# EAGLE board Duckietown Rev 2018A (EAGLE 8.5.2)
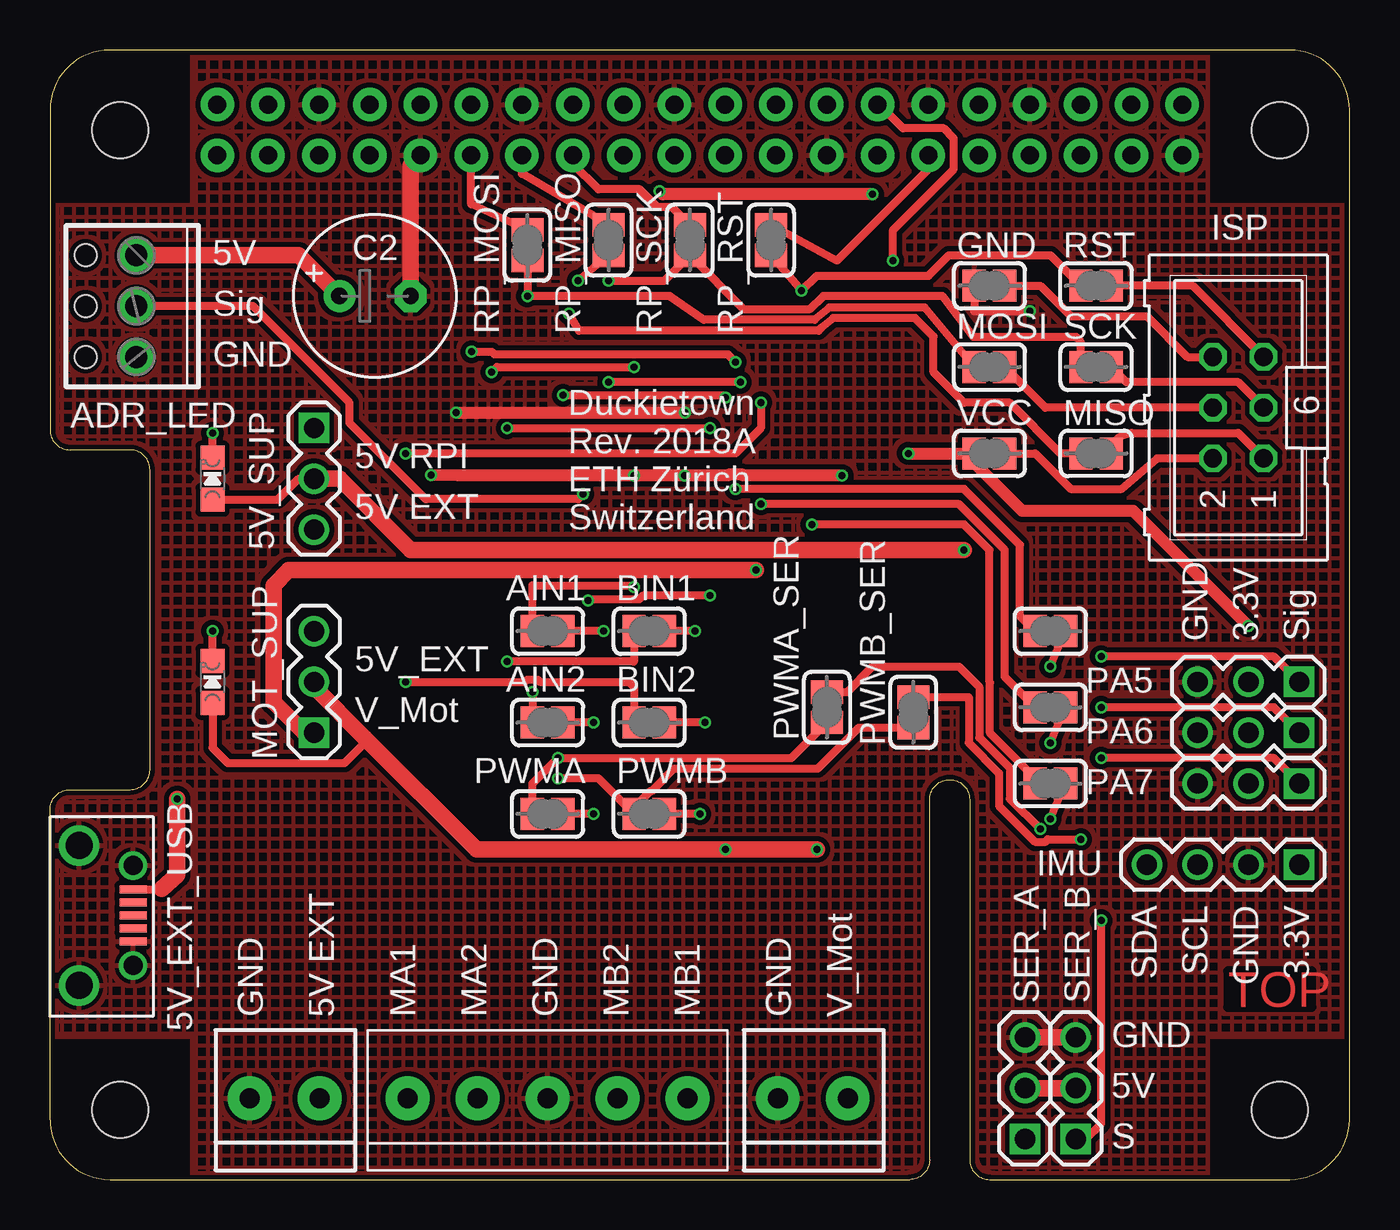
[diagram p0: board, top side]
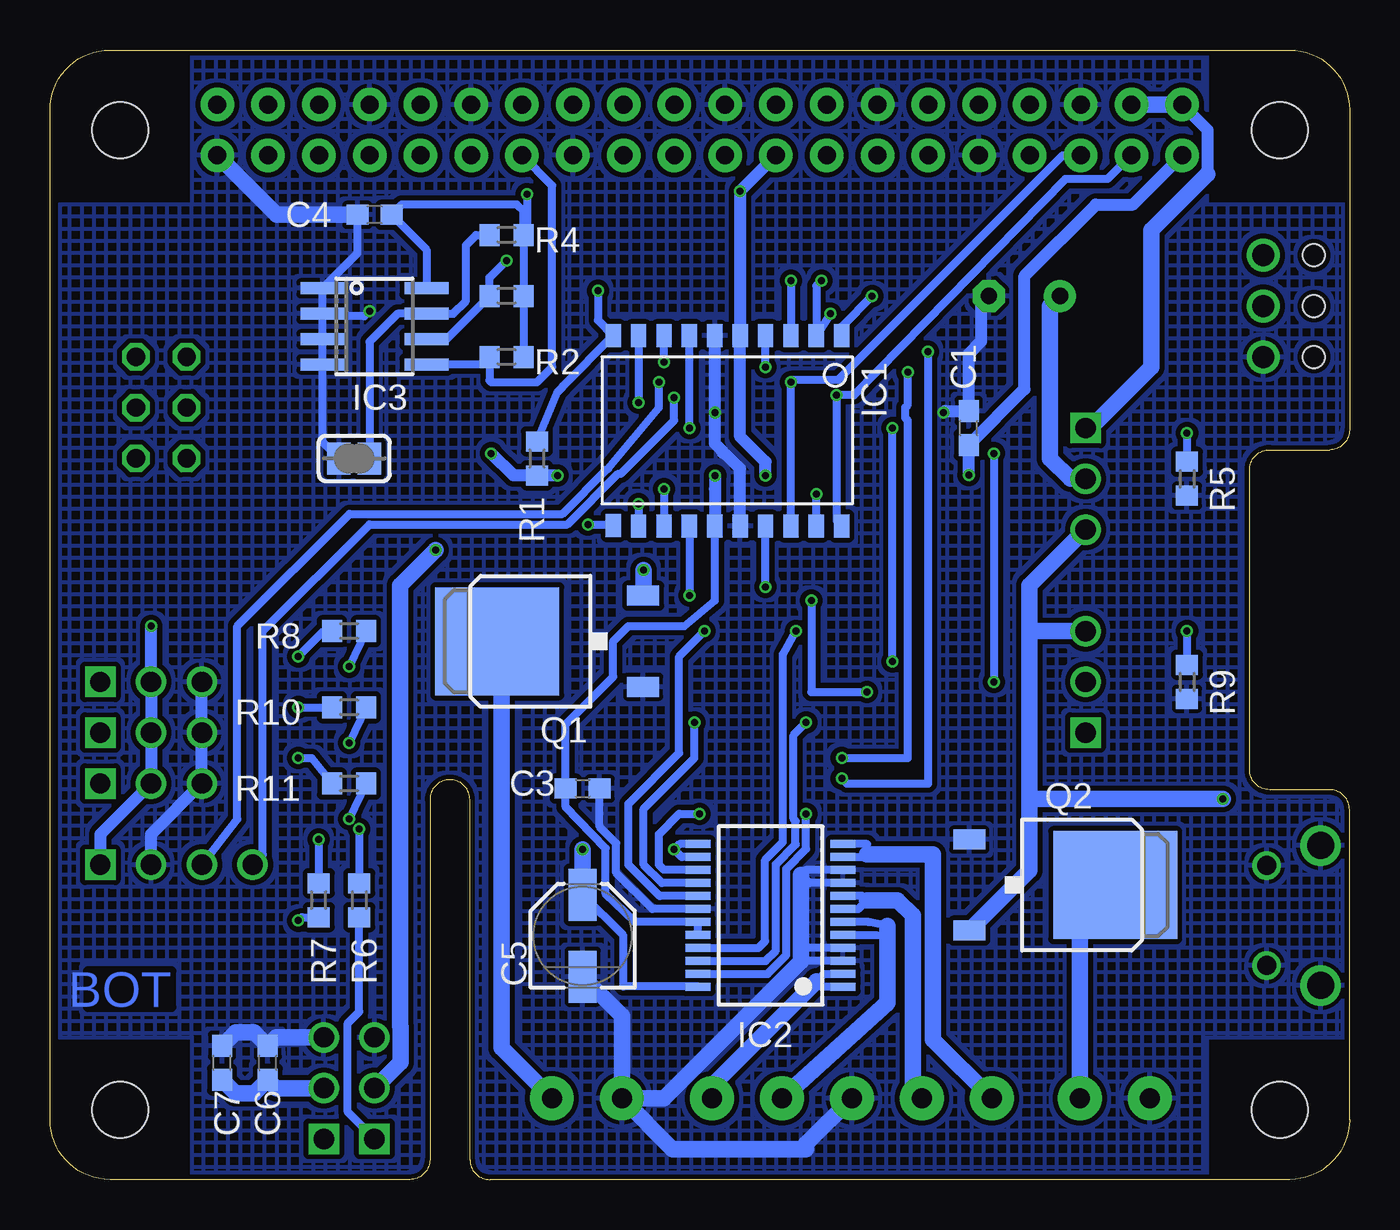
[diagram p1: board, bottom side, seen from below]

Size 65 x 56.5 mm. Coordinates in mm from the lower left corner, seen from the top.
Copper layers (1*16): Top 0.018mm / dielectric 1.55mm / Bottom 0.018mm
Design rules "Multi-CB_2L_125um-Tracks_OL35um *": minimum track width 0.125mm, minimum drill 0.2mm, track to track 0.125mm, track to pad 0.125mm, pad to pad 0.125mm, via to via 0.125mm, smd to smd 0mil, copper to edge 0.2mm, drill to drill 0.2mm, minimum pad ring 0.125mm, minimum via ring 0.125mm, stop-mask expansion 2mil, vias tented up to drill 0.45mm, thermal gap 0.2mm
Net classes: 0 default: width 0.406 mm, drill 0.406 mm; 1 Power: width 0.813 mm, drill 0.813 mm; 2 Supply: width 0.61 mm, drill 0.61 mm

## Footprints (pad centres in the part's own frame; a part is rotated, then mirrored left to right if it is on the bottom)
TERMBLOCK_1X2-3.5MM = drill 1 pad 2.184: 1 1.8,0; 2 -1.7,0
MICROUSBCON = smd 0.4 x 1.35: 1 -1.3,4.15; 2 -0.65,4.15; 3 0,4.15; 4 0.65,4.15; 5 1.3,4.15 | drill 0.95: SCHIELD@1 -2.5,4.15; SCHIELD@2 2.5,4.15 | drill 1.35: SCHIELD@3 -3.5,1.45; SCHIELD@4 3.5,1.45
1X03 = drill 1.016 pad 1.524 square: 1 0,0 | drill 1.016 pad 1.524: 2 2.54,0; 3 5.08,0
MPT0,5/3-2.54 = drill 1.1: 1 0,0; 2 2.54,0; 3 5.08,0 | hole 1.1: 0,-2.54; 2.54,-2.54; 5.08,-2.54
SOLDERJUMPER_CLOSEDWIRE = smd 1.168 x 1.6: 1 -0.762,0; 2 0.762,0 | smd 0.635 x 0.305: WIRE 0,0
C0603 = smd 1.1 x 1: 1 -0.85,0; 2 0.85,0
E3,5-8 = drill 0.813 pad 1.6: + -1.778,0 | drill 0.813 pad 1.6 octagon: - 1.778,0
PANASONIC_C = smd 2.6 x 1.4: + 2.05,0; - -2.05,0
SO20L = smd 0.762 x 1.143: 1 -5.08,-5.131; 2 -3.81,-5.131; 3 -2.54,-5.131; 4 -1.27,-5.131; 5 0,-5.131; 6 1.27,-5.131; 7 2.54,-5.131; 8 3.81,-5.131; 9 5.08,-5.131; 10 6.35,-5.131; 11 6.35,4.369; 12 5.08,4.394; 13 3.81,4.394; 14 2.54,4.394; 15 1.27,4.394; 16 0,4.394; 17 -1.27,4.394; 18 -2.54,4.394; 19 -3.81,4.394; 20 -5.08,4.394
SSOP24 = smd 0.4 x 1.25: 1 -3.575,-3.625; 2 -2.925,-3.625; 3 -2.275,-3.625; 4 -1.625,-3.625; 5 -0.975,-3.625; 6 -0.325,-3.625; 7 0.325,-3.625; 8 0.975,-3.625; 9 1.625,-3.625; 10 2.275,-3.625; 11 2.925,-3.625; 12 3.575,-3.625; 13 3.575,3.625; 14 2.925,3.625; 15 2.275,3.625; 16 1.625,3.625; 17 0.975,3.625; 18 0.325,3.625; 19 -0.325,3.625; 20 -0.975,3.625; 21 -1.625,3.625; 22 -2.275,3.625; 23 -2.925,3.625; 24 -3.575,3.625
SOIC8_150MIL = smd 0.6 x 2.2: 1 -1.905,-2.6; 2 -0.635,-2.6; 3 0.635,-2.6; 4 1.905,-2.6; 5 1.905,2.6; 6 0.635,2.6; 7 -0.635,2.6; 8 -1.905,2.6
1X04 = drill 1.016 pad 1.524 square: 1 0,0 | drill 1.016 pad 1.524: 2 2.54,0; 3 5.08,0; 4 7.62,0
ML6 = drill 0.914 octagon: 1 -2.54,-1.27; 2 -2.54,1.27; 3 0,-1.27; 4 0,1.27; 5 2.54,-1.27; 6 2.54,1.27
CHIPLED_0805_NOOUTLINE = smd 1.2 x 1.2: A 0,-1.05; C 0,1.05
1X05-3.5MM = drill 1 pad 2.184: 1 7,0; 2 3.5,0; 3 0,0; 4 -3.5,0; 5 -7,0
D-PAK_TO252AA = smd 1 x 1.6: 1 -2.28,-4.8; 3 2.28,-4.8 | smd 5.4 x 6.2: 4 0,2.5
R0603 = smd 1 x 1.1: 1 -0.85,0; 2 0.85,0
PI_HAT_SLOTS = drill 0.9 pad 1.676: 1 8.37,51.23; 2 8.37,53.77; 3 10.91,51.23; 4 10.91,53.77; 5 13.45,51.23; 6 13.45,53.77; 7 15.99,51.23; 8 15.99,53.77; 9 18.53,51.23; 10 18.53,53.77; 11 21.07,51.23; 12 21.07,53.77; 13 23.61,51.23; 14 23.61,53.77; 15 26.15,51.23; 16 26.15,53.77; 17 28.69,51.23; 18 28.69,53.77; 19 31.23,51.23; 20 31.23,53.77; 21 33.77,51.23; 22 33.77,53.77; 23 36.31,51.23; 24 36.31,53.77; 25 38.85,51.23; 26 38.85,53.77; 27 41.39,51.23; 28 41.39,53.77; 29 43.93,51.23; 30 43.93,53.77; 31 46.47,51.23; 32 46.47,53.77; 33 49.01,51.23; 34 49.01,53.77; 35 51.55,51.23; 36 51.55,53.77; 37 54.09,51.23; 38 54.09,53.77; 39 56.63,51.23; 40 56.63,53.77 | hole 2.8: 3.5,3.5; 3.5,52.5; 61.5,52.5; 61.5,3.5

## Placement (x,y rotation side)
5V_EXT  [TERMBLOCK_1X2-3.5MM]  11.68,4.06 0 top
5V_EXT_USB  MICROUSBCON  [MICROUSBCON]  0,13.21 270 top
5V_SUP  [1X03]  13.21,37.59 270 top
ADR_LED  [MPT0,5/3-2.54]  4.32,46.23 270 top
AIN1  [SOLDERJUMPER_CLOSEDWIRE]  24.89,27.43 0 top
AIN2  [SOLDERJUMPER_CLOSEDWIRE]  24.89,22.86 0 top
BIN1  [SOLDERJUMPER_CLOSEDWIRE]  29.97,27.43 0 top
BIN2  [SOLDERJUMPER_CLOSEDWIRE]  29.97,22.86 0 top
C1  0.1uF  [C0603]  19.05,37.59 90 bottom
C2  [E3,5-8]  16.26,44.2 0 top
C3  0.1uF  [C0603]  38.35,19.56 0 bottom
C4  0.1uF  [C0603]  48.77,48.26 180 bottom
C5  47uF+/16v  [PANASONIC_C]  38.35,12.19 90 bottom
C6  1uF  [C0603]  54.1,5.84 90 bottom
C7  1uF  [C0603]  56.39,5.84 90 bottom
GND  [SOLDERJUMPER_CLOSEDWIRE]  46.99,44.7 0 top
IC1  ATTINY861V-10SU  [SO20L]  30.48,37.08 180 bottom
IC2  TB6612FNG  [SSOP24]  28.96,13.21 90 bottom
IC3  CAT24C32  [SOIC8_150MIL]  48.77,42.67 270 bottom
IMU  [1X04]  62.48,15.75 180 top
ISP  [ML6]  59.44,38.61 90 top
LED1  Red 12V  [CHIPLED_0805_NOOUTLINE]  8.13,24.89 0 top
LED2  Green 5V  [CHIPLED_0805_NOOUTLINE]  8.13,35.05 0 top
MISO  [SOLDERJUMPER_CLOSEDWIRE]  52.32,36.32 0 top
MOSI  [SOLDERJUMPER_CLOSEDWIRE]  46.99,40.64 0 top
MOT_SUP  [1X03]  13.21,22.35 90 top
MOTA  1X5  [1X05-3.5MM]  24.89,4.06 0 top
PA5  [1X03]  62.48,24.89 180 top
PA6  [1X03]  62.48,22.35 180 top
PA7  [1X03]  62.48,19.81 180 top
PWMA  [SOLDERJUMPER_CLOSEDWIRE]  24.89,18.29 0 top
PWMA_SER  [SOLDERJUMPER_CLOSEDWIRE]  38.86,23.62 90 top
PWMB  [SOLDERJUMPER_CLOSEDWIRE]  29.97,18.29 0 top
PWMB_SER  [SOLDERJUMPER_CLOSEDWIRE]  43.18,23.37 90 top
Q1  AOD417  [D-PAK_TO252AA]  40.13,26.92 90 bottom
Q2  AOD417  [D-PAK_TO252AA]  14.22,14.73 270 bottom
R1  10K  [R0603]  40.64,36.07 270 bottom
R2  3.9K  [R0603]  42.16,41.15 180 bottom
R3  3.9K  [R0603]  42.16,44.2 180 bottom
R4  3.9K  [R0603]  42.16,47.24 180 bottom
R5  1.8K  [R0603]  8.13,35.05 270 bottom
R6  220  [R0603]  49.53,13.97 270 bottom
R7  220  [R0603]  51.56,13.97 270 bottom
R8  220  [R0603]  50.04,27.43 180 bottom
R9  5.6K  [R0603]  8.13,24.89 270 bottom
R10  220  [R0603]  50.04,23.62 180 bottom
R11  220  [R0603]  50.04,19.81 180 bottom
RP_MISO  [SOLDERJUMPER_CLOSEDWIRE]  27.94,46.99 90 top
RP_MOSI  [SOLDERJUMPER_CLOSEDWIRE]  23.88,46.74 90 top
RP_RST  [SOLDERJUMPER_CLOSEDWIRE]  36.07,46.99 90 top
RP_SCK  [SOLDERJUMPER_CLOSEDWIRE]  32,46.99 90 top
RPI2  RASPBERRYPI_BPLUS_HATSLOTS  [PI_HAT_SLOTS]  0,0 0 top
RST  [SOLDERJUMPER_CLOSEDWIRE]  52.32,44.7 0 top
SCK  [SOLDERJUMPER_CLOSEDWIRE]  52.32,40.64 0 top
SER_A  [1X03]  48.77,2.03 90 top
SER_B  [1X03]  51.31,2.03 90 top
SJ1  WP  [SOLDERJUMPER_CLOSEDWIRE]  49.78,36.07 0 bottom
UP_PA5  [SOLDERJUMPER_CLOSEDWIRE]  50.04,27.43 0 top
UP_PA6  [SOLDERJUMPER_CLOSEDWIRE]  50.04,23.62 0 top
UP_PA7  [SOLDERJUMPER_CLOSEDWIRE]  50.04,19.81 0 top
V_MOT  [TERMBLOCK_1X2-3.5MM]  38.1,4.06 0 top
VCC  [SOLDERJUMPER_CLOSEDWIRE]  46.99,36.32 0 top

## Library data of the parts
5V_EXT C5 IC3 LED1 LED2 V_MOT = microbuilder
5V_EXT_USB = USB Connector
5V_SUP IMU MOT_SUP PA5-PA7 SER_A SER_B = cambridge_garage_electronics
ADR_LED = conPhoenixContact
AIN1 AIN2 BIN1 BIN2 GND IC2 MISO MOSI MOTA PWMA PWMA_SER PWMB PWMB_SER RP_MISO RP_MOSI RP_RST RP_SCK RPI2 RST SCK SJ1 UP_PA5-UP_PA7 VCC = DuckietownTrafficLight
C1 C3 C4 C6 C7 = rcl; SPICEPREFIX: C
C2 = adafruit
IC1 = Attiny86
ISP = con-harting-ml; OC_FARNELL: unknown; OC_NEWARK: unknown
Q1 Q2 = transistor-power
R1-R11 = rcl; SPICEPREFIX: R

## Nets
5V_RPI [Power]: 5V_SUP.1 RPI2.2 RPI2.4
+3V3 [Supply]: C1.1 C3.1 C4.1 IC1.5 IC1.15 IC2.19 IC2.20 IC3.8 IMU.1 PA5.2 PA6.2 PA7.2 R1.2 R2.1 R3.1 R4.1 RPI2.1 RPI2.17 VCC.1
+5V [Power]: 5V_SUP.2 ADR_LED.1 C2.+ C6.1 C7.1 LED2.A SER_A.2 SER_B.2
+12V [Power]: C5.+ IC2.13 IC2.14 IC2.24 LED1.A MOT_SUP.2
ADRLED: ADR_LED.2 IC1.19
AIN1: AIN1.1 IC1.17
AIN2: AIN2.1 IC1.14
BIN1: BIN1.1 IC1.7
BIN2: BIN2.1 IC1.9
EECLK: IC3.6 R3.2 RPI2.28
EEDATA: IC3.5 R2.2 RPI2.27
GND: 5V_EXT.2 5V_EXT_USB.5 5V_EXT_USB.SCHIELD@1 5V_EXT_USB.SCHIELD@2 5V_EXT_USB.SCHIELD@3 5V_EXT_USB.SCHIELD@4 ADR_LED.3 C1.2 C2.- C3.2 C4.2 C5.- C6.2 C7.2 GND.1 IC1.6 IC1.16 IC2.3 IC2.4 IC2.9 IC2.10 IC2.18 IC3.1 IC3.2 IC3.3 IC3.4 IMU.2 MOTA.3 PA5.3 PA6.3 PA7.3 Q1.1 Q2.1 R5.2 R9.2 RPI2.6 RPI2.9 RPI2.14 RPI2.20 RPI2.25 RPI2.30 RPI2.34 RPI2.39 SER_A.3 SER_B.3 SJ1.1 V_MOT.2
MISO: IC1.2 MISO.1 RP_MISO.1
MOSI: IC1.1 MOSI.1 RP_MOSI.1
N$1 [Power]: Q1.4 V_MOT.1
N$11 [Power]: IC2.5 IC2.6 MOTA.2
N$12 [Power]: IC2.7 IC2.8 MOTA.4
N$13: LED1.C R9.1
N$14 [Power]: 5V_EXT.1 Q2.4
N$15: LED2.C R5.1
N$16: IC3.7 R4.2 SJ1.2
N$17 [Power]: IC2.11 IC2.12 MOTA.5
N$18 [Power]: IC2.1 IC2.2 MOTA.1
N$19 [Power]: MOT_SUP.1 Q1.3
N$20: R6.2 SER_A.1
N$22: PA5.1 R8.2
N$23: R7.2 SER_B.1
N$24: PA6.1 R10.2
N$25: PA7.1 R11.2
N$26: IC2.23 PWMA.2
N$27: AIN2.2 IC2.22
N$28: AIN1.2 IC2.21
N$29: BIN1.2 IC2.17
N$30: BIN2.2 IC2.16
N$31: IC2.15 PWMB.2
N$32: ISP.1 MISO.2
N$33: ISP.3 SCK.2
N$34: ISP.5 RST.2
N$35: ISP.4 MOSI.2
N$36 [Power]: GND.2 ISP.6
N$37 [Supply]: ISP.2 VCC.2
N$38: R10.1 UP_PA6.2
N$39: PWMB_SER.2 R7.1
N$40: PWMA_SER.2 R6.1
N$41: R8.1 UP_PA5.2
N$43: RP_SCK.2 RPI2.15
N$44: RP_MISO.2 RPI2.13
N$46: RP_MOSI.2 RPI2.11
N$48: RP_RST.2 RPI2.29
N$60: R11.1 UP_PA7.2
PA5: IC1.13 UP_PA5.1
PA6: IC1.12 UP_PA6.1
PA7: IC1.11 UP_PA7.1
PWMA: IC1.4 PWMA.1 PWMA_SER.1
PWMB: IC1.8 PWMB.1 PWMB_SER.1
RST: IC1.10 R1.1 RP_RST.1 RST.1
SCK: IC1.3 RP_SCK.1 SCK.1
SCL: IC1.18 IMU.3 RPI2.5
SDA: IC1.20 IMU.4 RPI2.3
VCC: 5V_EXT_USB.1 5V_SUP.3 MOT_SUP.3 Q2.3

## Tracks (layer width: path | path; a pad name or v marks a point on that pad's centre or on a via)
5V_RPI
  Bottom 0.61: 7.11,50.29 7.11,50.7 7.1,50.7 7.1,52.5 RPI2.2
  Bottom 0.813: RPI2.4 RPI2.2 | 7.11,50.29 9.91,47.5 9.91,40.64 12.95,37.59 5V_SUP.1
+3V3  (via drill 0.35)
  Top 0.61: v42.93,36.32 VCC.1 46.24,36.31 46.24,35.84 48.63,33.45 54.18,33.45 v59.94,27.69 | v41.15,49.28 30.64,49.28 v30.48,49.44 | v39.62,35.22 34.65,35.22 34.59,35.27 33.99,35.27 33.93,35.22 v31.73,35.22 v29.21,35.22 20.41,35.22 v19.05,35.24
  Bottom 0.406: IC2.20 IC2.19 35.74,12.88 37.21,14.29 37.21,16.57 39.2,18.63 C3.1 39.2,22.77 36.83,25.15 36.83,26.92 36.07,27.69 33.27,27.69 31.75,28.96 IC1.15 | IC3.8 46.17,46.51 C4.1 47.41,48.77 41.66,48.77 41.31,48.43 R4.1 | v41.15,49.28 41.15,47.41 R4.1 | R4.1 R3.1 R2.1
  Bottom 0.61: RPI2.17 v30.48,49.44 IC1.5 30.48,37.16 29.21,35.89 v29.21,35.22 | v31.73,35.22 31.75,34.54 IC1.15 | v39.62,35.22 R1.2 41.82,35.22 v42.93,36.32 | v59.94,27.69 PA5.2 PA6.2 PA7.2 62.48,17.27 IMU.1 | v19.05,35.24 C1.1 16.26,39.54 16.26,45.21 12.7,48.77 10.83,48.77 RPI2.1
+5V  (via drill 0.35)
  Top 0.406: LED2.A 11.4,34 12.45,35.05 5V_SUP.2
  Top 0.813: SER_A.2 SER_B.2 | 5V_SUP.2 14.48,35.05 18.03,31.5 v45.72,31.5 | C2.+ 12.45,46.23 ADR_LED.1
  Bottom 0.813: SER_B.2 53.68,4.57 C6.1 54.78,4.32 55.71,4.32 C7.1 | SER_A.2 47.48,5.87 47.48,7.65 47.5,7.67 47.5,29.72 v45.72,31.5 | C2.+ 14.99,43.69 14.99,36.07 13.97,35.05 5V_SUP.2
+12V  (via drill 0.35)
  Top 0.406: MOT_SUP.2 13.21,24.64 | LED1.A 8.13,21.59 8.89,20.83 14.73,20.83 15.75,21.84 15.75,22.1
  Top 0.813: v38.35,16.51 v33.78,16.51 21.34,16.51 15.75,22.1 13.21,24.64
  Bottom 0.406: IC2.24 32.6,9.65 36.32,9.65 36.32,12.21 C5.+ 38.35,14.99 | IC2.13 33.51,16.78 v33.78,16.51 33.41,16.13 IC2.14
  Bottom 0.813: v38.35,16.51 38.35,14.99
ADRLED  (via drill 0.35)
  Top 0.406: v26.67,34.29 26.42,34.04 18.8,34.04 14.99,37.85 14.99,38.86 10.16,43.69 ADR_LED.2
  Bottom 0.406: IC1.19 v26.67,34.29
AIN1  (via drill 0.35)
  Top 0.406: AIN1.1 24.13,29.72 29.14,29.72 v29.21,29.65
  Bottom 0.406: v29.21,29.65 IC1.17
AIN2  (via drill 0.35)
  Top 0.406: v33.02,29.21 29.66,29.21 29.47,29.02 26.99,29.02 v26.92,28.96 | v24.13,24.38 AIN2.1
  Bottom 0.406: IC1.14 v33.02,29.21 | v26.92,28.96 26.92,24.38 v24.13,24.38
BIN1  (via drill 0.35)
  Top 0.406: BIN1.1 29.21,25.91 v22.86,25.91 | v22.86,37.59 v33.02,37.59
  Bottom 0.406: v22.86,25.91 v22.86,37.59 | v33.02,37.59 IC1.7
BIN2  (via drill 0.35)
  Top 0.406: v35.56,38.86 35.56,37.59 34.29,36.32 v17.78,36.32 | v17.78,24.89 23.75,24.89 23.87,25.01 24.39,25.01 24.51,24.89 28.96,24.89 29.21,24.64 BIN2.1
  Bottom 0.406: IC1.9 v35.56,38.86 | v17.78,36.32 v17.78,24.89
EECLK  (via drill 0.35)
  Top 0.406: v42.16,45.97 42.16,47.5 45.21,50.55 45.21,52.07 44.7,52.58 42.67,52.58 41.48,53.77 RPI2.28
  Bottom 0.406: IC3.6 45.17,42.04 R3.2 43.01,45.12 v42.16,45.97
EEDATA
  Bottom 0.406: IC3.5 43.4,40.77 R2.2 43.01,39.97 42.93,39.88 40.64,39.88 39.88,40.64 39.88,49.72 RPI2.27
GND  (via drill 0.35)
  Top 0.406: GND.1 46.23,43.43 v49.02,43.43
  Top 0.61: v20.32,38.35 v31.75,38.35
  Top 0.813: SER_A.3 SER_B.3 | C2.- 18.03,50.73 RPI2.9
  Bottom 0.406: IC2.10 27.19,15.48 27.43,15.24 27.02,14.83 IC2.9 | IC2.4 27.33,11.58 27.43,11.68 | IC2.3 27.42,10.93 27.43,10.92 | IC2.18 34.87,13.53 36.68,15.34 36.68,16.82 37.5,17.64 C3.2 | SJ1.1 51.37,36.89 IC3.4 IC3.3 IC3.2 | IC3.2 IC3.1 49.62,46.33 C4.2 | v49.02,43.43 49.28,43.18 51.24,43.18 IC3.2
  Bottom 0.61: IMU.2 59.94,17.27 PA7.3 PA6.3 PA5.3 | IC1.16 30.48,35.56 31,36.08 31.01,36.08 31.15,36.22 31.36,36.36 31.38,36.45 31.75,36.82 v31.75,38.35 IC1.6 | C2.- 18.41,43.81 18.41,41.93 19.05,41.3 C1.2 20.23,38.44 v20.32,38.35
  Bottom 0.813: V_MOT.2 36.4,8.19 C5.- | V_MOT.2 34.29,4.06 27.43,10.92 27.43,11.68 27.43,15.24 | SER_B.3 53.68,7.11 C6.2 54.78,7.37 55.71,7.37 C7.2 | MOTA.3 27.18,1.78 27.18,1.52 33.86,1.52 V_MOT.2 | C4.2 53.66,48.26 RPI2.39
  pour Top (isolate 0.254, hatched): 7.11,0 7.11,7.11 0,7.11 0,48.77 7.11,48.77 7.11,56.39 57.91,56.39 57.91,48.77 65.02,48.77 65.02,7.11 57.91,7.11 57.91,0
  pour Bottom (isolate 0.254, hatched): 7.11,0 7.11,7.11 0,7.11 0,48.77 7.11,48.77 7.11,56.39 57.91,56.39 57.91,48.77 64.52,48.77 64.52,7.11 57.91,7.11 57.91,0
MISO  (via drill 0.35)
  Top 0.406: RP_MISO.1 v26.42,44.96 | MISO.1 50.55,36.32 48.01,38.86 45.72,38.86 44.2,40.39 44.2,42.16 43.27,43.09 39.18,43.09 38.6,42.61 38.44,42.46 26.45,42.46 v25.97,43.31
  Bottom 0.406: v26.42,44.96 26.67,44.7 IC1.2 v25.97,43.31
MOSI  (via drill 0.35)
  Top 0.406: RP_MOSI.1 v23.88,44.2 31,44.2 32.7,43.01 38.24,43.01 38.98,43.62 43.75,43.62 MOSI.1
  Bottom 0.406: v23.88,44.2 25.4,42.67 IC1.1
N$1
  Bottom 0.813: Q1.4 42.49,26.56 42.49,25.91 42.42,25.91 42.42,6.58 V_MOT.1
N$11
  Bottom 0.406: 23.11,12.7 24.06,12.88 IC2.6 | IC2.5 23.66,12.23 23.11,12.19
  Bottom 0.813: 23.11,12.7 23.11,12.19 23.11,8.83 MOTA.2
N$12
  Bottom 0.406: IC2.8 24.34,14.18 24.13,13.97 24.57,13.53 IC2.7
  Bottom 0.813: MOTA.4 21.84,4.52 21.84,13.21 22.61,13.97 24.13,13.97
N$13  (via drill 0.35)
  Top 0.406: LED1.C v8.13,27.43
  Bottom 0.406: v8.13,27.43 R9.1
N$14
  Bottom 0.813: 5V_EXT.1 13.48,12.68 11.94,14.22 11.94,14.52 Q2.4
N$15  (via drill 0.35)
  Top 0.406: LED2.C v8.13,37.34
  Bottom 0.406: v8.13,37.34 R5.1
N$16
  Bottom 0.406: R4.2 43.69,47.24 44.2,46.74 44.2,43.94 44.83,43.31 IC3.7 47.62,43.31 49.02,41.91 SJ1.2
N$17
  Bottom 0.406: IC2.12 24.13,16.78 24.13,16.26 24.13,16.13 IC2.11
  Bottom 0.813: MOTA.5 20.83,7 20.83,16.26 24.13,16.26
N$18
  Bottom 0.406: IC2.2 26.29,10.28 26.67,9.91 26.4,9.63 IC2.1
  Bottom 0.813: MOTA.1 31.89,4.68 26.67,9.91
N$19  (via drill 0.35)
  Top 0.813: MOT_SUP.1 12.7,22.35 11.18,23.88 11.18,29.72 11.94,30.48 v35.31,30.48
  Bottom 0.813: Q1.3 35.31,29.23 v35.31,30.48
N$20
  Bottom 0.406: R6.2 49.53,8.4 50.11,7.82 50.11,3.38 SER_A.1
N$22  (via drill 0.35)
  Top 0.406: PA5.1 61.21,26.16 v52.58,26.16
  Bottom 0.406: v52.58,26.16 51.31,27.43 R8.2
N$23  (via drill 0.35)
  Top 0.406: SER_B.1 51.82,2.03 52.58,2.79 v52.58,12.95
  Bottom 0.406: v52.58,12.95 52.41,13.12 R7.2
N$24  (via drill 0.35)
  Top 0.406: PA6.1 61.21,23.62 v52.58,23.62
  Bottom 0.406: v52.58,23.62 R10.2
N$25  (via drill 0.35)
  Top 0.406: PA7.1 61.21,21.08 v52.58,21.08
  Bottom 0.406: v52.58,21.08 51.9,21.08 R11.2
N$26  (via drill 0.35)
  Top 0.406: v27.18,18.29 PWMA.2
  Bottom 0.406: IC2.23 29.11,10.28 28.17,11.23 28.17,15.54 27.18,16.53 v27.18,18.29
N$27  (via drill 0.35)
  Top 0.406: v27.18,22.86 AIN2.2
  Bottom 0.406: IC2.22 29.21,10.93 28.7,11.45 28.7,15.76 27.71,16.75 27.71,16.76 27.71,17.93 27.81,18.03 27.81,22.23 v27.18,22.86
N$28  (via drill 0.35)
  Top 0.406: v27.69,27.43 AIN1.2
  Bottom 0.406: IC2.21 29.57,11.58 29.23,11.92 29.23,15.98 28.34,16.88 28.34,26.27 v27.69,27.43
N$29  (via drill 0.35)
  Top 0.406: v32.26,27.43 BIN1.2
  Bottom 0.406: IC2.17 34.5,14.18 36.07,15.75 36.07,18.8 33.53,21.34 33.53,26.16 v32.26,27.43
N$30  (via drill 0.35)
  Top 0.406: v32.77,22.86 BIN2.2
  Bottom 0.406: IC2.16 34.39,14.83 35.31,15.75 35.31,18.54 32.77,21.08 v32.77,22.86
N$31  (via drill 0.35)
  Top 0.406: v32.51,18.29 PWMB.2
  Bottom 0.406: IC2.15 32.59,15.49 34.29,15.49 34.54,15.75 34.54,17.27 33.53,18.29 v32.51,18.29
N$32
  Top 0.406: MISO.2 arc-90 54.1,37.34 59.44,37.34 ISP.1
N$33
  Top 0.406: ISP.3 59.44,39.88 53.85,39.88 SCK.2
N$34
  Top 0.406: ISP.5 57.15,44.7 RST.2
N$35
  Top 0.406: ISP.4 49.78,38.61 MOSI.2
N$36
  Top 0.406: ISP.6 56.9,41.15 54.86,43.18 51.05,43.18 49.53,44.7 GND.2
N$37
  Top 0.406: ISP.2 55.37,36.07 53.59,34.54 51.05,34.54 49.28,36.32 VCC.2
N$38  (via drill 0.35)
  Top 0.406: v50.04,21.84 50.67,23.32 50.68,23.33 50.68,23.51 UP_PA6.2
  Bottom 0.406: R10.1 v50.04,21.84
N$39  (via drill 0.35)
  Top 0.406: PWMB_SER.2 45.95,24.13 45.95,21.84 47.48,20.32 47.48,18.69 49.27,16.9 49.79,16.9 49.91,17.02 v51.56,17.02
  Bottom 0.406: v51.56,17.02 R7.1
N$40  (via drill 0.35)
  Top 0.406: PWMA_SER.2 39.88,24.38 41.15,25.65 45.47,25.65 46.48,24.64 46.48,22.11 48.01,20.58 48.01,19.05 v49.53,17.53
  Bottom 0.406: v49.53,17.53 R6.1
N$41  (via drill 0.35)
  Top 0.406: v50.04,25.65 50.67,27.13 50.68,27.14 50.68,27.32 UP_PA5.2
  Bottom 0.406: R8.1 v50.04,25.65
N$43
  Top 0.406: RPI2.15 26.16,51.23 26.16,50.8 27.43,49.53 29.5,49.53 30.38,48.64 31.11,48.64 RP_SCK.2
N$44
  Top 0.406: RP_MISO.2 23.61,50.3 RPI2.13
N$46
  Top 0.406: RP_MOSI.2 21.07,48.78 RPI2.11
N$48
  Top 0.406: RP_RST.2 39.37,45.97 43.93,50.53 RPI2.29
N$60  (via drill 0.35)
  Top 0.406: v50.04,18.04 50.67,19.51 50.68,19.52 50.68,19.7 UP_PA7.2
  Bottom 0.406: R11.1 v50.04,18.04
PA5  (via drill 0.35)
  Top 0.406: UP_PA5.1 48.51,28.19 48.51,31.75 45.72,34.54 v34.29,34.54
  Bottom 0.406: v34.29,34.54 IC1.13
PA6  (via drill 0.35)
  Top 0.406: UP_PA6.1 47.75,25.15 47.75,31.5 45.47,33.78 v35.56,33.78
  Bottom 0.406: v35.56,33.78 IC1.12
PA7  (via drill 0.35)
  Top 0.406: UP_PA7.1 49.28,20.07 47.01,22.33 47.01,24.86 46.99,24.88 46.99,31.5 45.72,32.77 v38.1,32.77
  Bottom 0.406: v38.1,32.77 36.88,32.77 IC1.11
PWMA  (via drill 0.35)
  Top 0.406: PWMA.1 24.13,19.81 v25.4,21.08 37.08,21.08 PWMA_SER.1 | v22.1,40.39 22.35,40.64 v29.21,40.64
  Bottom 0.406: v25.4,21.08 22.1,21.08 22.1,37.97 22.22,38.09 22.22,38.62 22.1,38.74 v22.1,40.39 | v29.21,40.64 IC1.4
PWMB  (via drill 0.35)
  Top 0.406: PWMB_SER.1 40.46,22.61 38.4,20.55 31.22,20.55 30.08,19.42 30.01,19.42 29.33,18.73 29.33,18.4 PWMB.1 27.43,20.07 v25.4,20.07 | v21.08,41.4 22.11,41.4 22.23,41.27 33.92,41.27 v34.29,40.89
  Bottom 0.406: v25.4,20.07 25.15,19.81 21.08,19.81 v21.08,41.4 | v34.29,40.89 IC1.8
RST  (via drill 0.35)
  Top 0.406: RP_RST.1 v37.59,44.45 38.35,45.21 43.94,45.21 44.96,46.23 50.04,46.23 RST.1
  Bottom 0.406: v37.59,44.45 37.59,42.98 IC1.10 39.35,39.7 39.35,39.66 39.62,39.38 R1.1
SCK  (via drill 0.35)
  Top 0.406: SCK.1 51.56,41.91 51.33,42.14 46.18,42.14 44.63,44.2 38.68,44.2 38.02,43.54 34.69,43.54 RP_SCK.1 30.73,44.96 v27.94,44.96
  Bottom 0.406: v27.94,44.96 IC1.3
SCL  (via drill 0.35)
  Top 0.406: v34.54,39.88 v27.94,39.88
  Bottom 0.406: IMU.3 55.63,18.03 55.63,27.69 50.02,33.3 39.37,33.3 37.11,35.56 37.08,35.56 34.54,38.61 v34.54,39.88 | IC1.18 v27.94,39.88 27.81,40.01 25.56,40.01 14.34,51.23 RPI2.5
SDA  (via drill 0.35)
  Top 0.406: v25.65,39.23 33.67,39.23 v33.78,39.12
  Bottom 0.406: IMU.4 54.36,16.26 54.36,27.43 49.02,32.77 39.12,32.77 36.58,35.31 36.45,35.31 33.78,37.97 v33.78,39.12 | RPI2.3 12.1,50.04 14.22,50.04 24.78,39.23 v25.65,39.23 25.65,32.94 IC1.20
VCC  (via drill 0.35)
  Top 0.406: 5V_EXT_USB.1 5.55,14.51 5.59,14.54
  Top 0.813: v6.35,19.05 6.35,15.24 5.59,14.54
  Bottom 0.813: Q2.3 16,15.47 16,19.05 | 5V_SUP.3 16,29.72 16,27.43 | 16,19.05 16,27.43 | MOT_SUP.3 16,27.43 | 16,19.05 v6.35,19.05

## Text on the board
Top: TOP
Bottom: BOT
tNames: 5V | Sig | GND | 5V RPI | 5V EXT | Duckietown / Rev. 2018A / ETH Zürich / Switzerland | GND | 3.3V | Sig | 5V_EXT | V_Mot | SDA | SCL | GND | 3.3V | GND | 5V EXT | MA1 | MA2 | GND | MB2 | MB1 | GND | V_Mot | GND | 5V | S
bValues: ATTINY861V / -10SU | TB6612 / FNG